# Altium PCB JLinkV9-nano.PcbDoc
Units mil, origin at the board's own origin, x right, y up, seen from the top; angles counter-clockwise.
Board outline 1816 x 920 mil, 2 copper layers (Top Layer, Bottom Layer); 56 components, 43 nets, 214 pads, 61 vias.
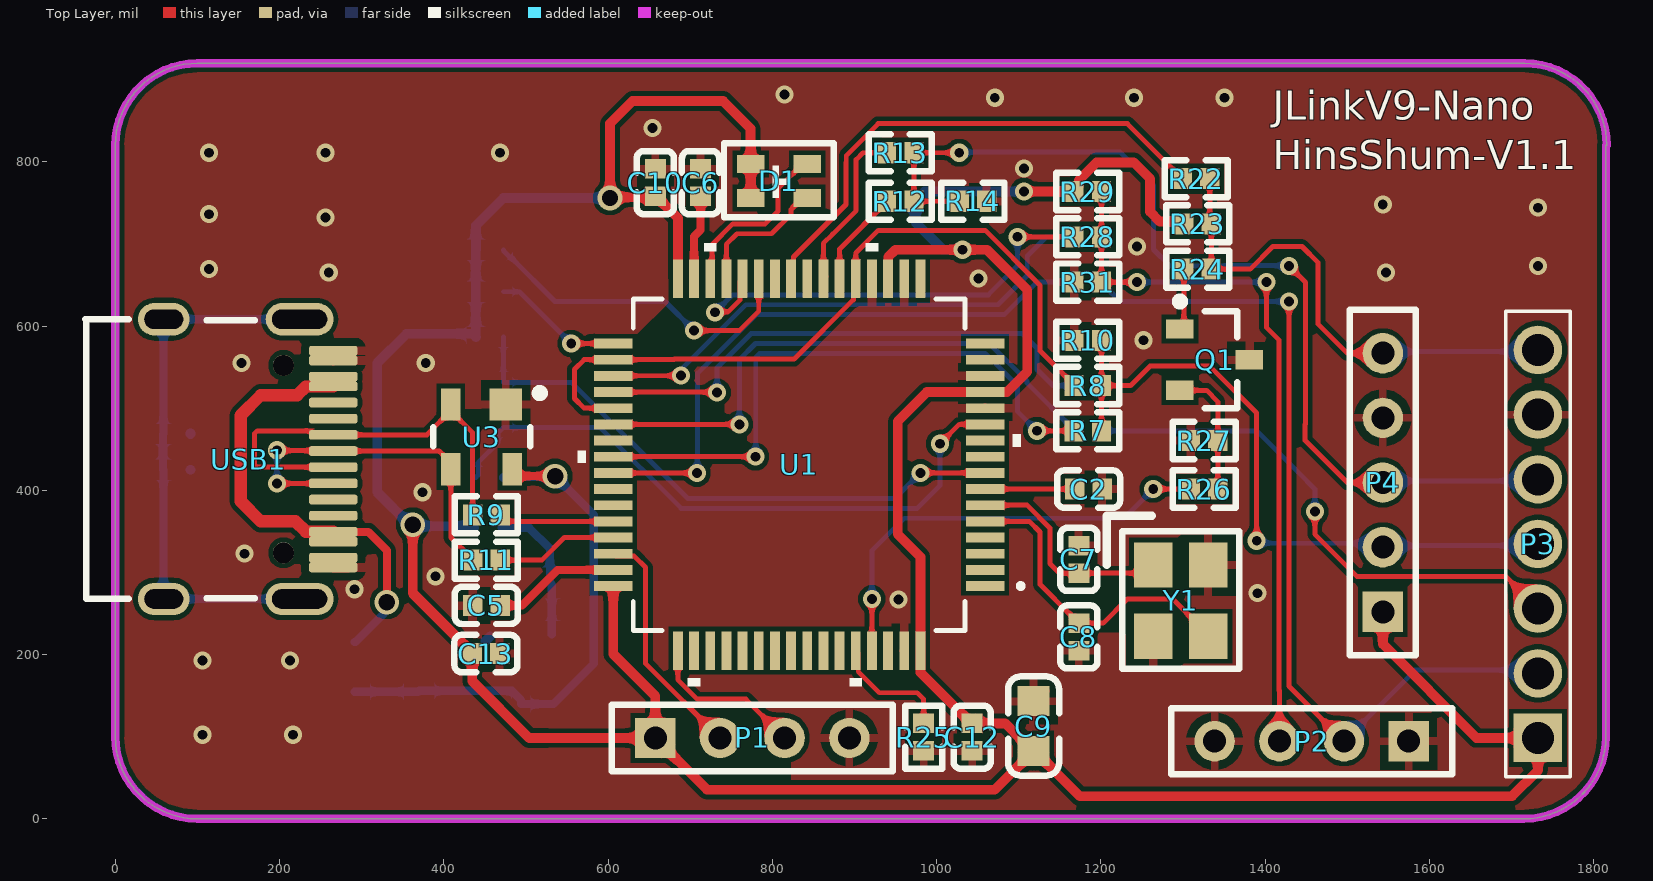
[diagram p0: Top Layer view]
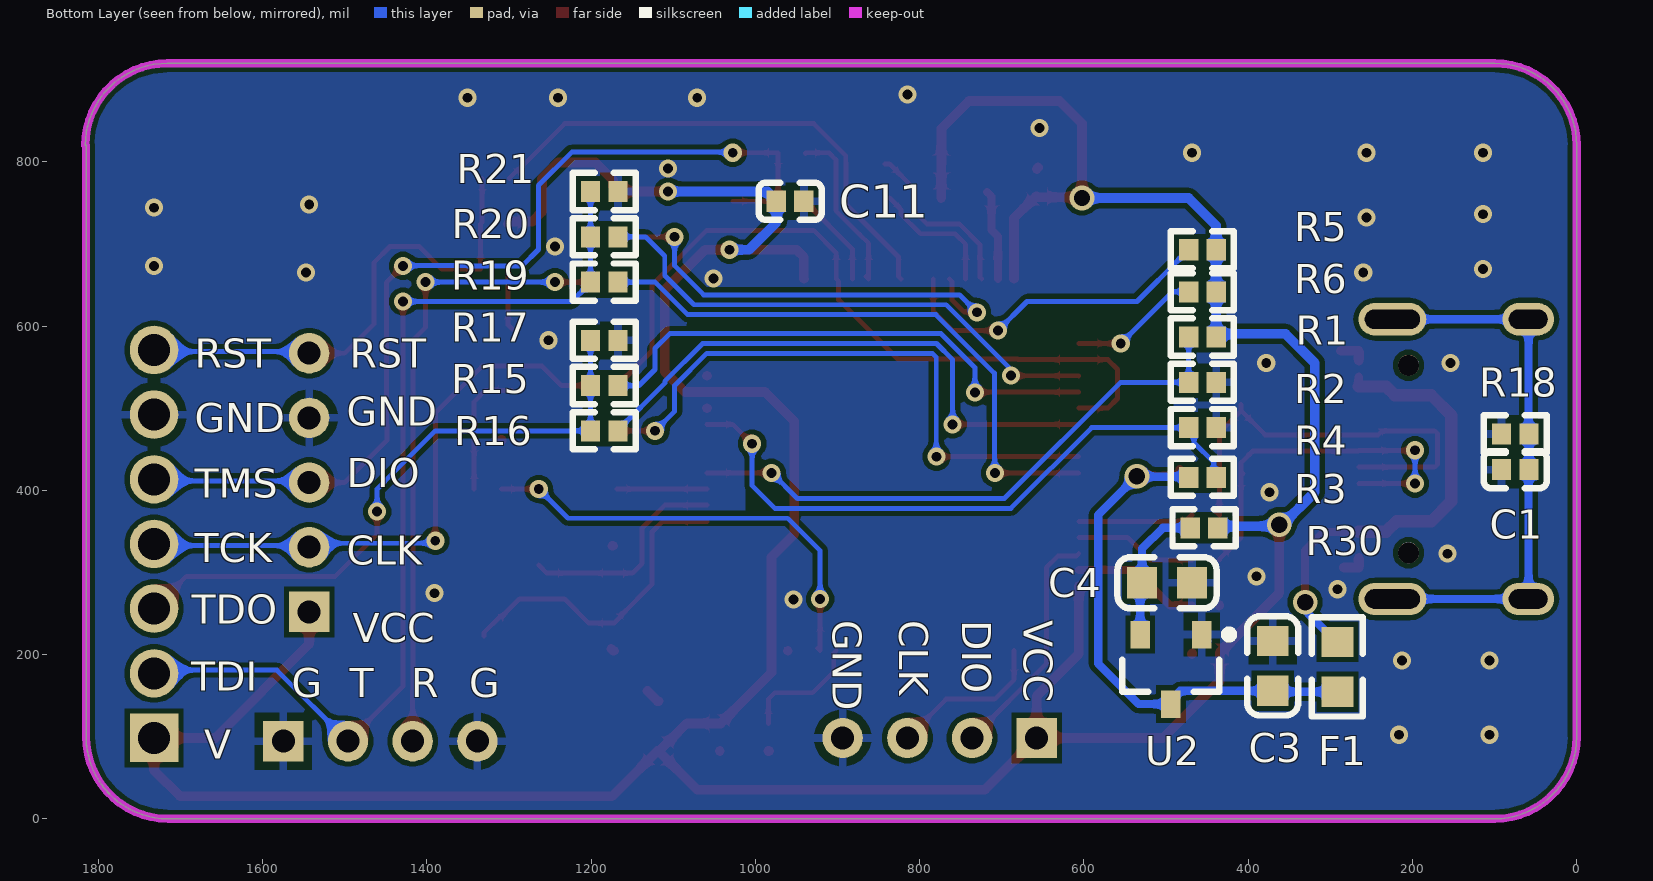
[diagram p1: Bottom Layer view, seen from below]
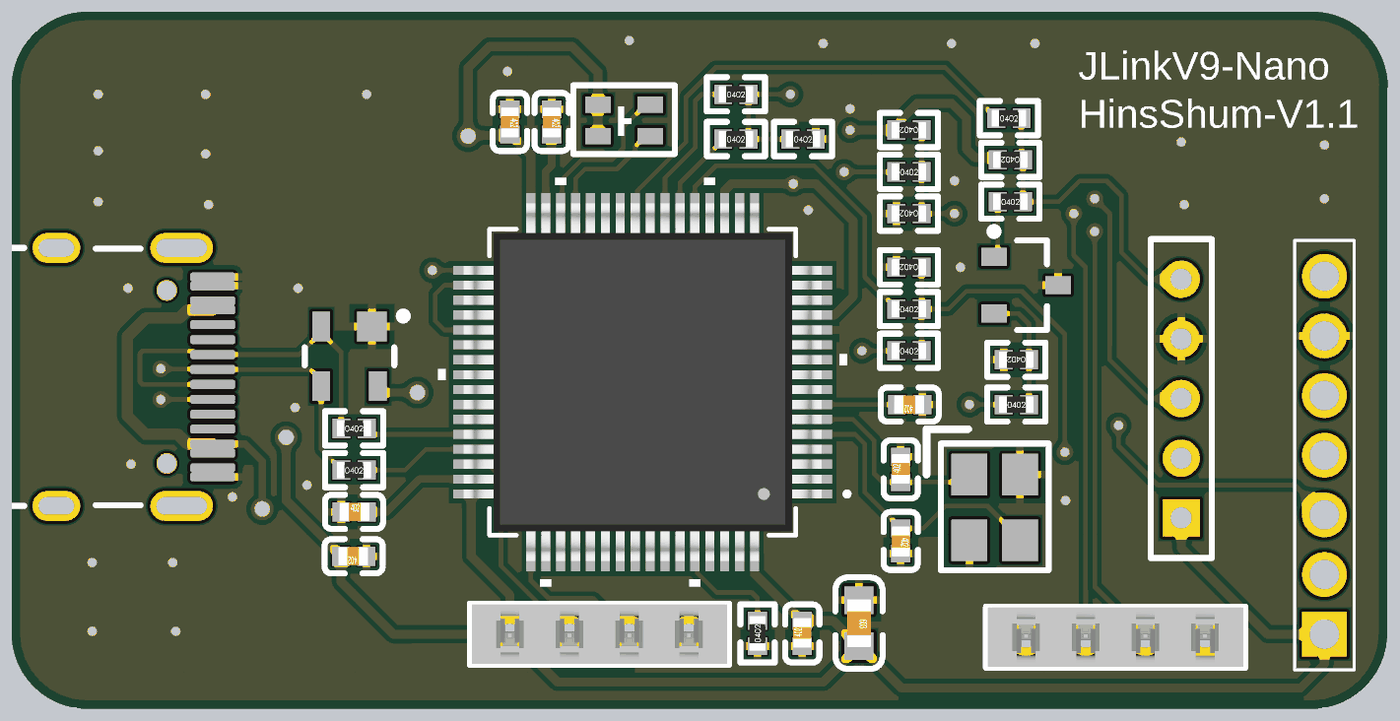
[diagram p2: 3D render of the assembled board from above, using the file's embedded part models]
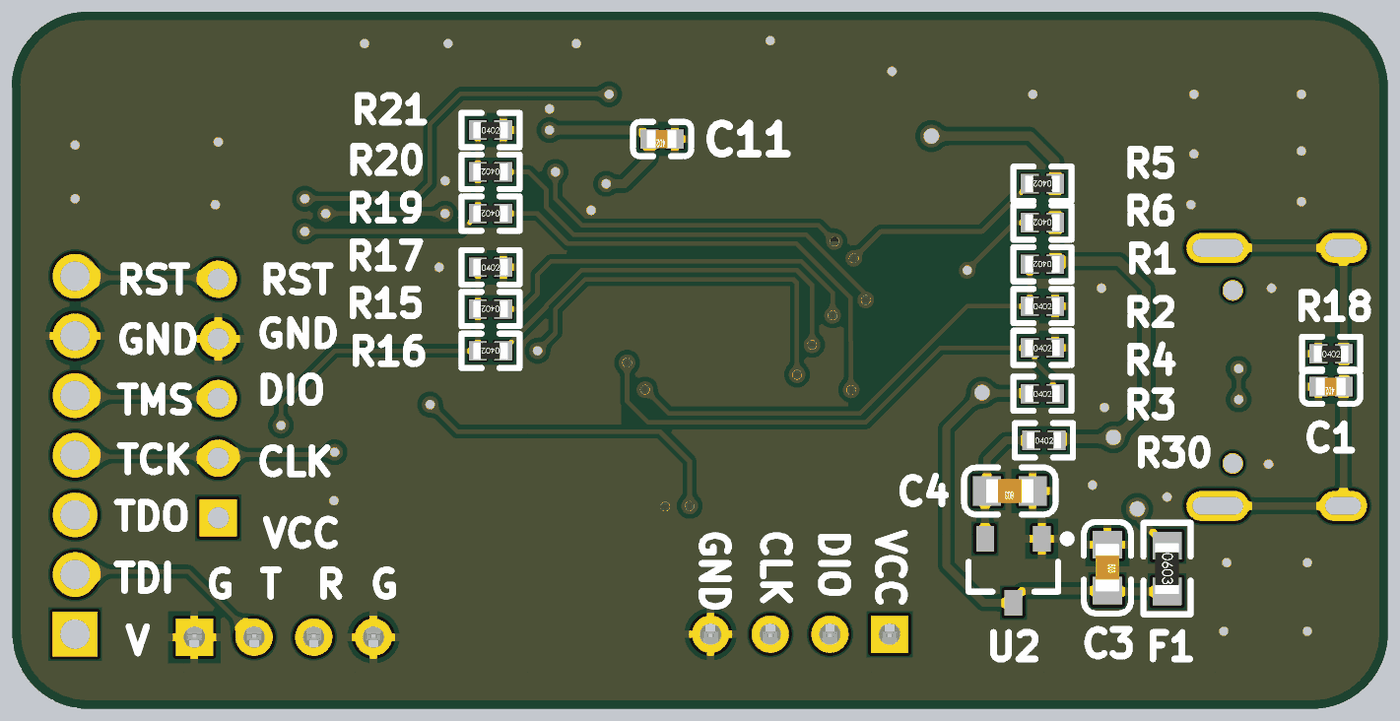
[diagram p3: 3D render of the assembled board from below, using the file's embedded part models]

## Layer stack, top to bottom
Top Solder: solder mask 0.4, Solder Resist, Dk 3.5
Top Layer: signal copper 1.4
Dielectric 1: dielectric 12.6, FR-4, Dk 4.8
Bottom Layer: signal copper 1.4
Bottom Solder: solder mask 0.4, Solder Resist, Dk 3.5

## Board outline
0,100 0,820 cw(c100,820) 100,920 1716,920 cw(c1716,820) 1816,820 1815,820 1815,100 cw(c1715,100) 1715,0 100,0 cw(c100,100)

## Design rules (kind name [scope] priority, off if disabled: settings)
Clearance [All] p1: gap=6 ignorepadtopadclearanceinfootprint=FALSE
PolygonConnect [All] p1: thpad.connectstyle=Relief thpad.reliefconductorwidth=10 thpad.reliefentries=4 thpad.polygonreliefangle="90 Angle" thpad.airgapwidth=10 smdpad.connectstyle=Relief smdpad.reliefconductorwidth=10 smdpad.reliefentries=4 smdpad.polygonreliefangle="90 Angle" smdpad.airgapwidth=10 via.connectstyle=Direct via.reliefconductorwidth=10 via.reliefentries=4 via.polygonreliefangle="90 Angle" via.airgapwidth=10
RoutingVias [All] p1: holewidth=12 width=22 viastyle="Through Hole" minholewidth=12 minwidth=22 maxholewidth=28 maxwidth=50
SilkToSolderMaskClearance [IsPad] p1: minsilkscreentomaskgap=2 clearancetoexposedcopper=TRUE
SolderMaskExpansion [All] p1: expansion=4 istentingtop=FALSE
Width Power [InNetClass('Power')] p1: maxlimit=20 minlimit=10 preferedwidth=10
Width [All] p2: maxlimit=10 minlimit=6 preferedwidth=6
29 further rules are at their usual default settings.

## Classes and differential pairs
net class Power: 3.3V 5V +5V_IN GND
component class JLinkV9-nano: C2 C3 C4 C5 C6 C7 C10 C11 C13 D1 F1 R1 R2 R3 R4 R5 R6 R7 R8 R9 R10 R12 R14 R15 R16 R17 R18 R19 R20 R21 R22 R23 R24 R25 R26 R27 R28 R29 R30 R31 U2 Y1

## Components (designator, comment, footprint, x,y, rotation, side; value= is the part's Value field where it differs from the comment)
C1 "Cap" C0402 74.8,425.2 r0 bottom value=10nF
C2 "Cap" C0402 1185.04,401.58 r180 top value=100nF
C3 "Cap" C0603 370.08,186.22 r270 bottom value=10uF
C4 "Cap" C0603 498.82,287.4 r0 bottom value=10uF
C5 "Cap" C0402 451.77,259.84 r0 top value=2.2uF
C6 "Cap" C0402 712.6,774.61 r270 top value=2.2uF
C7 "Cap" C0402 1173.23,315.94 r90 top value=22pF
C8 "Cap" C0402 1173.23,221.46 r270 top value=22pF
C9 "Cap" C0603 1118.11,112.99 r270 top value=10uF
C10 "Cap" C0402 657.48,774.61 r270 top value=100nF
C11 "Cap" C0402 957.68,751.97 r0 bottom value=100nF
C12 "Cap" C0402 1043.31,99.41 r90 top value=100nF
C13 "Cap" C0402 451.28,201.28 r180 top value=100nF
D1 "LED2" LED_2 859.25,755.91 r180 top
F1 "Fuse 2" R0603 291.34,185.04 r270 bottom
P1 "Header 4" 2_0MM_4_HEADER 657.48,98.43 r0 top
P2 "Header 4" 2_0MM_4_HEADER 1574.8,94.49 r180 top
P3 "Header 7" 2_0MM_7_HEADER 1732.28,98.43 r90 top
P4 "Header 5" 2_0MM_5_HEADER 1543.31,251.97 r90 top
Q1 "NEC3400" SOT-23_L 1338.58,559.06 r0 top
R1 "Res" R0402 455.71,586.61 r0 bottom value=10K
R2 "Res" R0402 455.71,531.5 r180 bottom value=10K
R3 "Res" R0402 455.71,415.85 r180 bottom value=10K
R4 "Res" R0402 455.71,476.38 r180 bottom value=10K
R5 "Res" R0402 455.71,692.91 r0 bottom value=10K
R6 "Res" R0402 455.71,641.73 r0 bottom value=10K
R7 "Res" R0402 1184.05,472.44 r0 top value=100R
R8 "Res" R0402 1184.05,527.56 r0 top value=100R
R9 "Res" R0402 451.77,370.08 r0 top value=22R
R10 "Res" R0402 1184.06,582.68 r180 top value=10K
R11 "Res" R0402 451.77,314.96 r0 top value=22R
R12 "Res" R0402 955.71,751.97 r0 top value=100R
R13 "Res" R0402 955.71,811.02 r0 top value=100R
R14 "Res" R0402 1044.29,751.97 r0 top value=10K
R15 "Res" R0402 1184.05,527.56 r0 bottom value=100R
R16 "Res" R0402 1184.05,472.44 r0 bottom value=100R
R17 "Res" R0402 1184.06,582.68 r180 bottom value=10K
R18 "Res" R0402 74.8,468.5 r180 bottom value=1M
R19 "Res" R0402 1184.05,653.54 r0 bottom value=100R
R20 "Res" R0402 1184.05,708.66 r0 bottom value=100R
R21 "Res" R0402 1184.06,763.78 r180 bottom value=10K
R22 "Res" R0402 1315.94,779.53 r0 top value=100R
R23 "Res" R0402 1317.91,724.41 r180 top value=10K
R24 "Res" R0402 1317.91,669.29 r0 top value=100R
R25 "Res" R0402 984.25,99.41 r90 top value=10K
R26 "Res" R0402 1325.79,401.57 r0 top value=1K
R27 "Res" R0402 1325.79,460.63 r180 top value=1M
R28 "Res" R0402 1184.05,708.66 r0 top value=100R
R29 "Res" R0402 1184.06,763.78 r180 top value=10K
R30 "Res" R0402 453.74,354.33 r180 bottom value=0R
R31 "Res" R0402 1184.06,653.54 r180 top value=10K
U1 "STM32F205RET6" LQFP64-10x10mm 832.68,431.1 r180 top
U2 "ME6210A33M3G" SOT-23_L 494.09,182.09 r270 bottom
U3 "UET14A05L03" SOT-143_L 445.91,465.2 r270 top
USB1 "Type-C" USB-Type-C 166.14,437.99 r180 top
Y1 "12M" XTAL4 1297.24,309.06 r270 top

## Footprints (in the part's own frame and the unit in brackets; to place one, negate y for a bottom-side part, rotate by r counter-clockwise, add the part's x,y. Pads: shape width x height; smd on the part's side, far side on the other; paste and mask are expansions set on the pad)
2_0MM_4_HEADER [mm] "Through Hole Box Connector Strip Assembly, 1x4 Pins, Vertical, 2mm Pitch, Female"
  rect 1.25x1.25 hole 0.711: 1(0,0)
  round 1.25 hole 0.711: 2(2,0) 3(4,0) 4(6,0)
  silkscreen extent -1.35,-1.03 7.34,1.03, body extent -1.28,-1 7.28,1, height 4.44
2_0MM_5_HEADER [mm] "Through Hole Box Connector Strip Assembly, 1x4 Pins, Vertical, 2mm Pitch, Female"
  rect 1.25x1.25 hole 0.711: 1(0,0)
  round 1.25 hole 0.711: 2(2,0) 3(4,0) 4(6,0) 5(8,0)
  silkscreen extent -1.35,-1.03 9.35,1.03
2_0MM_7_HEADER [mm] "Socket Strip Assembly, 1x7 Pins, Right Anlge, 2mm Pitch, Female"
  rect 1.5x1.5 hole 0.99: 1(0,0)
  round 1.5 hole 0.99: 2(2,0) 3(4,0) 4(6,0) 5(8,0) 6(10,0) 7(12,0)
  silkscreen extent -1.2,-1 13.2,1
C0402 [mm] "电容"
  rect 0.6x0.65 smd mask+0.051: 1(-0.425,0) 2(0.425,0)
  silkscreen extent -0.97,-0.58 0.97,0.58, body extent -0.48,-0.3 0.52,0.3, height 0.2
C0603 [mm]
  rect 0.93x0.98 smd: 1(-0.77,0) 2(0.77,0)
  silkscreen extent -1.53,-0.79 1.54,0.79, body extent -0.8,-0.4 0.8,0.4, height 0.3
LED_2 [mm]
  rect 0.85x0.55 smd: 1(2.175,0) 2(0.425,0) 3(2.175,-1.05) 4(0.425,-1.05)
  silkscreen extent -0.4,-1.7 3,0.6
LQFP64-10x10mm [mil]
  rect 47x12 smd paste+0 mask+0: 1(-226.38,147.64) 2(-226.38,127.95) 3(-226.38,108.27) 4(-226.38,88.58) 5(-226.38,68.9) 6(-226.38,49.21) 7(-226.38,29.53) 8(-226.38,9.84) 9(-226.38,-9.84) 10(-226.38,-29.53) 11(-226.38,-49.21) 12(-226.38,-68.9) 13(-226.38,-88.58) 14(-226.38,-108.27) 15(-226.38,-127.95) 16(-226.38,-147.64) 33(226.38,-147.64) 34(226.38,-127.95) 35(226.38,-108.27) 36(226.38,-88.58) 37(226.38,-68.9) 38(226.38,-49.21) 39(226.38,-29.53) 40(226.38,-9.84) 41(226.38,9.84) 42(226.38,29.53) 43(226.38,49.21) 44(226.38,68.9) 45(226.38,88.58) 46(226.38,108.27) 47(226.38,127.95) 48(226.38,147.64)
  rect 12x47 smd paste+0 mask+0: 17(-147.64,-226.38) 18(-127.95,-226.38) 19(-108.27,-226.38) 20(-88.58,-226.38) 21(-68.9,-226.38) 22(-49.21,-226.38) 23(-29.53,-226.38) 24(-9.84,-226.38) 25(9.84,-226.38) 26(29.53,-226.38) 27(49.21,-226.38) 28(68.9,-226.38) 29(88.58,-226.38) 30(108.27,-226.38) 31(127.95,-226.38) 32(147.64,-226.38) 49(147.64,226.38) 50(127.95,226.38) 51(108.27,226.38) 52(88.58,226.38) 53(68.9,226.38) 54(49.21,226.38) 55(29.53,226.38) 56(9.84,226.38) 57(-9.84,226.38) 58(-29.53,226.38) 59(-49.21,226.38) 60(-68.9,226.38) 61(-88.58,226.38) 62(-108.27,226.38) 63(-127.95,226.38) 64(-147.64,226.38)
  silkscreen extent -273,-270 270,270, body extent -236,-236 236,236, height 63
R0402 [mm] "电阻"
  rect 0.6x0.65 smd mask+0.051: 1(-0.425,0) 2(0.425,0)
  silkscreen extent -0.97,-0.58 0.97,0.58, body extent -0.57,-0.27 0.57,0.28, height 0.41
R0603 [mm]
  rect 0.93x0.98 smd: 1(-0.77,0) 2(0.77,0)
  silkscreen extent -1.53,-0.79 1.54,0.79, body extent -0.85,-0.4 0.85,0.4, height 0.56
SOT-23_L [mm] "SOT23, 3-Leads, Body 2.9x1.3mm, Pitch 0.95mm, Lead Span 2.5mm, IPC High Density"
  rect 0.85x0.6 smd: 1(-1.075,0.95) 2(-1.075,-0.95) 3(1.075,0)
  silkscreen extent -1.2,-1.5 0.7,1.92, body extent -0.7,-1.5 0.7,1.5, height 1.1
SOT-143_L [mm] "SOT143, 4-Leads, Body 2.9x1.3mm, Pitch 1.9mm, Lead Span 2.5mm, IPC High Density"
  rect 1x1 smd: 1(-1,0.75)
  rect 1x0.6 smd: 2(-1,-0.95) 3(1,-0.95) 4(1,0.95)
  silkscreen extent -1.47,-1.5 0.3,1.93, body extent -0.7,-1.52 0.7,1.52, height 1.1
USB-Type-C [mm]
  round 0.65 hole 0.65: 0(-0.98,2.9) 0(-0.98,-2.9)
  oval 1.6x1 hole 0.6 slot 1.2 at 0 deg: 1(2.72,4.325) 2(2.72,-4.325)
  oval 2.1x1 hole 0.6 slot 1.7 at 0 deg: 3(-1.48,-4.325) 4(-1.48,4.325)
  rrect50% 1.5x0.3 smd: A1(-2.52,-3.35) A4(-2.52,-2.55) A5(-2.52,-1.25) A6(-2.52,-0.25) A7(-2.52,0.25) A8(-2.52,1.25) A9(-2.52,2.55) A12(-2.52,3.35) B1(-2.52,3.05) B4(-2.52,2.25) B5(-2.52,1.75) B6(-2.52,0.75) B7(-2.52,-0.75) B8(-2.52,-1.75) B9(-2.52,-2.25) B12(-2.52,-3.05)
  silkscreen extent -0.1,-4.33 5.15,4.33, body extent -2.64,-4.48 5.26,4.46, height 0.25
XTAL4 [mm]
  rect 1.4x1.2 smd: 1(0,-0.85) 2(2.2,-0.85) 3(2.2,0.85) 4(0,0.85)
  silkscreen extent -1.52,-2.29 3.2,1.81

## Part data
C1 C2 C3 C4 C5 C6 C7 C8 C9 C10 C11 C12 C13: "Capacitor", LatestRevisionDate=17-Jul-2002, LatestRevisionNote="Re-released for DXP Platform.", PackageDescription="Radial Cap, Thru-Hole; 2 Leads; 0.3 in Pin Spacing", PackageReference=RAD-0.3, Published=8-Jun-2000, Publisher="Altium Limited"
D1: "Typical RED, GREEN, YELLOW, AMBER GaAs LED", LatestRevisionDate=17-Jul-2002, LatestRevisionNote="Re-released for DXP Platform.", PackageDescription="SM LED; 2 Flat Leads", PackageReference=3.2X1.6X1.1, PackageVersion=Feb-2002, Published=8-Jun-2000, Publisher="Altium Limited"
F1: "Fuse", LatestRevisionDate=17-Jul-2002, LatestRevisionNote="Re-released for DXP Platform.", PackageDescription="Thru-Hole; 2 Leads", PackageReference=PIN-W2/E2.8, Published=8-Jun-2000, Publisher="Altium Limited"
P1 P2: "Header, 4-Pin", LatestRevisionDate=17-Jul-2002, LatestRevisionNote="Re-released for DXP Platform.", Publisher="Altium Limited"
P3: "Header, 7-Pin", LatestRevisionDate=17-Jul-2002, LatestRevisionNote="Re-released for DXP Platform.", Publisher="Altium Limited"
P4: "Header, 5-Pin", LatestRevisionDate=17-Jul-2002, LatestRevisionNote="Re-released for DXP Platform.", Publisher="Altium Limited"
Q1: library part MOSFET-N, "N-Channel MOSFET", LatestRevisionDate=17-Jul-2002, LatestRevisionNote="Re-released for DXP Platform.", PackageDescription="TO, Flat Index; 3 In-Line, Axial Leads; Body Dia. 4.6mm; Lead Dia. 0.5 mm (max)", PackageReference=E3, PackageVersion=1995/1996, Published=8-Jun-2000, Publisher="Altium Limited"
R1 R2 R3 R4 R5 R6 R7 R8 R9 R10 R11 R12 R13 R14 R15 R16 R17 R18 R19 R20 R21 R22 R23 R24 R25 R26 R27 R28 R29 R30 R31: "Resistor", LatestRevisionDate=17-Jul-2002, LatestRevisionNote="Re-released for DXP Platform.", PackageDescription="Axial Device, Thru-Hole; 2 Leads; 0.3 in Pin Spacing", PackageReference=AXIAL-0.3, Published=8-Jun-2000, Publisher="Altium Limited"
U1: "No Description Available", Mfr_Name=STMicroelectronics, Copyright="Copyright (C) 2021 Ultra Librarian. All rights reserved.", Manufacturer_Part_Number=STM32F205RET6, RefDes=RefDes, Type=DEV
U3: library part ESD4
USB1: library part USB-TYPE-C
Y1: library part XTAL4

## Via types
v1: diameter 22, hole 12, Top Layer to Bottom Layer, tented both sides, 57 vias
v2: diameter 30, hole 20, Top Layer to Bottom Layer, tented both sides, 4 vias

## Nets (pads, with @x,y where several pads share a name; then routed paths per layer and width w, separated by ;. In a path a pad name is that pad's centre, name@x,y a point inside that pad or via, vN(x,y) a via of type N, cw(c..) or ccw(c..) an arc to the next point about the centre after c; other vN are vias at no path point)
3.3V: C9.2 C10.2 C11.2 C12.2 C13.2 D1.1 D1.3 P1.1 P3.1 P4.1 R1.1 R5.1 R6.1 R23.2 R29.2 R30.2 U1.13 U1.19 U1.32 U1.48 U1.64 | length 4932.8
  Top Layer w11.81: 527.56,98.43 P1.1 720.47,35.43 1070.87,35.43 C9.2 ; C10.2 658.46,757.87 685.04,731.3 U1.32 ; D1.1 D1.3 ; U1.19 941.04,657.57 941.04,684.23 949.73,692.91 v1(1031.5,692.91) 1061.6,692.91 1110.24,644.28 1110.24,544.21 1085.8,519.78 1059.15,519.78 U1.13 988.19,519.69 952.76,484.25 952.76,346.46 980.31,318.9 U1.64 980.41,204.63 980.41,178.06 1042.32,116.14 C12.2 1083.66,116.14 1117.13,82.68 C9.2 ; v1(1106.3,763.78) R29.2 1173.23,769.69 1173.23,777.66 1194.78,799.21 1240.16,799.21 1259.84,779.53 1259.84,739.2 1271.65,727.39 1298.2,727.39 R23.2 ; P4.1 1543.31,212.6 1657.48,98.43 P3.1 1732.28,59.06 1700.79,27.56 1174.21,27.56 1119.09,82.68 C9.2
  Top Layer w12: v2(362.2,358.27) 362.2,274.61 434.55,202.26 C13.2 434.55,167.81 503.94,98.43 527.56,98.43 ; U1.48 606.3,200.79 657.48,149.61 P1.1 ; C10.2 656.5,756.89 603.35,756.89 v2(602.36,755.91) 602.36,846.46 629.92,874.02 740.16,874.02 773.62,840.55 D1.3
  Bottom Layer w11.81: R1.1 R6.1 R5.1 ; v1(1031.5,692.91) 1007.87,692.91 973.92,726.87 973.92,752.46 980.32,758.86 985.24,763.78 v1(1106.3,763.78)
  Bottom Layer w12: R30.2 435.04,356.3 364.17,356.3 v2(362.2,358.27) 358.27,358.27 318.9,397.64 318.9,555.12 354.33,590.55 435.04,590.55 R1.1 ; R5.1 438.98,722.44 472.44,755.91 v2(602.36,755.91)
5V: C3.2 F1.2 R3.1 U2.3 U3.4 | length 691.3
  Top Layer w10: U3.4 483.31,424.13 490.12,417.32 v2(535.43,417.32)
  Bottom Layer w10: F1.2 368.9,154.72 C3.2 482.87,155.91 494.09,144.68 U2.3 533.46,139.76 582.68,188.98 582.68,370.08 v2(535.43,417.32) 534.69,416.58 474.16,416.58 472.44,414.86 R3.1
+5V_IN: F1.1 USB1.A4 USB1.A9 USB1.B4 USB1.B9 | length 574.9
  Top Layer w10: USB1.B4 308.07,349.41 330.71,326.77 v2(330.71,263.78) ; USB1.B9 USB1.A4
  Top Layer w15: USB1.B4 265.07,349.69 231.96,349.69 219.45,362.2 177.17,362.2 152.55,386.82 152.55,491.13 177.17,515.75 221.42,515.75 231.96,526.3 265.07,526.3 USB1.B9
  Bottom Layer w10: F1.1 292.32,215.35 326.88,249.91 326.88,259.95 v2(330.71,263.78)
GLED: D1.4 U1.30 | length 215.2
  Top Layer w6: U1.30 726.6,659.67 726.6,699.04 751.97,724.41 791.34,724.41 807.09,740.16 807.09,767.72 836.61,797.24 D1.4
GND: C1.2 C2.1 C3.1 C4.1 C5.1 C6.1 C7.2 C8.2 C9.1 C10.1 C11.1 C12.1 C13.1 P1.4 P2.1 P2.4 P3.6 P4.4 Q1.3 R2.2 R4.2 R10.2 R14.2 R17.2 R18.1 R21.2 R25.1 R27.2 R31.2 U1.12 U1.14 U1.18 U1.20 U1.63 U2.1 U3.1 USB1.A1 USB1.A12 USB1.B1 USB1.B12 Y1.2 Y1.4 | length 171
  Top Layer w11.81: USB1.B1 USB1.A12 USB1.A12@283.46,306.1 ; USB1.B12 USB1.A1 USB1.A1@287.4,569.88 ; v1@374.02,394.88 v1(374.02,397.64) ; v1@375.2,555.12 v1(377.95,555.12) v1@380.71,555.12 ; v1(389.76,295.28) v1@391.71,293.33 ; C5.1 C5.1@435.04,260.83 ; C13.1 C13.1@468.5,200.79 ; v1(654.22,841.34) v1@655.85,839.71 ; C10.1@655.85,792.97 C10.1 ; P1.4 P1.4@899.7,92.43 ; v1@953.63,264.08 v1(953.63,266.84) ; U1.63 U1.63@960.72,204.63 ; R25.1@983.27,82.68 R25.1 ; U1.14@1058.96,539.46 U1.14 ; U1.12 U1.12@1059.15,499.91 ; C9.1 1119.09,143.31 C9.1@1131.5,155.71 ; C8.2@1172.24,204.72 C8.2 C8.2@1175.69,207.19 ; C7.2 C7.2@1174.21,332.68 ; v1(1251.97,582.68) v1@1251.97,585.43 ; R27.2 R27.2@1309.06,461.61 ; P2.4@1338.58,86.61 P2.4 ; v1@1388.69,276.66 v1(1390.64,274.71) ; P2.1@1566.93,86.61 P2.1
  Bottom Layer w11.81: R18.1 R18.1@91.54,469.49 ; v1@377.95,552.36 v1(377.95,555.12) ; U2.1@450.79,216.54 U2.1@456.69,222.44 ; P1.4 P1.4@895.67,96.46 ; C11.1 C11.1@940.94,752.95 ; v1@1048.47,657.98 v1(1051.23,657.98) ; v1(1106.3,791.78) v1@1106.74,791.34 ; v1(1251.97,582.68) v1@1252.08,582.57 ; P2.4@1336.61,96.46 P2.4 ; P3.6@1728.35,488.19 P3.6
  other v1: 106.3,102.36 216.54,102.36 106.3,192.91 212.6,192.91 291.34,279.53 157.48,322.83 153.54,555.12 259.84,665.35 1547.24,665.35 114.17,669.29 1732.28,673.23 1244.09,696.85 255.91,732.28 114.17,736.22 1732.28,744.09 1543.31,748.03 114.17,811.02 255.91,811.02 468.5,811.02 1070.87,877.95 1240.16,877.95 1350.39,877.95 814.96,881.89
NetC1_1: C1.1 R18.2 USB1.1 USB1.2 USB1.3 USB1.4 | length 672.1
  Bottom Layer w9.84: USB1.4 USB1.1 58.56,268.21 58.56,424.7 C1.1 R18.2 58.56,469 58.56,607.78 USB1.2 USB1.3
NetC2_2: C2.2 U1.7 | length 109.3
  Top Layer w6: U1.7 C2.2
NetC4_2: C4.2 R30.1 U2.2 | length 174.8
  Bottom Layer w10: R30.1 503.94,354.33 529.13,329.13 C4.2 531.5,285.04 U2.2
NetC5_2: C5.2 U1.47 | length 155.7
  Top Layer w9.84: C5.2 495.08,259.84 538.39,303.15 U1.47
NetC6_2: C6.2 U1.31 | length 110.8
  Top Layer w10: U1.31 704.72,709.08 712.6,716.96 C6.2 C6.2@717.66,762.93
NetQ1_1: Q1.1 R24.1 | length 74.9
  Top Layer w6: Q1.1 1301.18,601.38 R24.1
NetQ1_2: Q1.2 R26.2 R27.1 | length 158.3
  Top Layer w6: Q1.2 1328.74,521.65 1342.52,507.87 R27.1 R26.2
NetR9_2: R9.2 U1.44 | length 141.1
  Top Layer w6: R9.2 476.38,362.2 U1.44
NetR11_2: R11.2 U1.45 | length 149.2
  Top Layer w6: R11.2 519.28,314.96 546.84,342.52 U1.45
NetR25_2: R25.2 U1.60 | length 149.9
  Top Layer w6: U1.60 904.57,201.72 904.57,179.18 930.21,153.54 976.38,153.54 984.25,145.67 R25.2
OSC_IN: C8.1 U1.5 Y1.3 | length 394.2
  Top Layer w6: U1.5 1112.95,362.2 1125.98,349.17 1125.98,285.43 1163.43,247.98 1163.43,247 1172.24,238.19 C8.1 1202.76,238.19 1232.28,267.72 1287.4,267.72 1308.12,247 1310.09,247 1330.71,226.38 Y1.3
OSC_OUT: C7.1 U1.6 Y1.1 | length 268.4
  Top Layer w6: U1.6 1110.24,381.89 1137.98,354.14 1137.98,310.84 1149.61,299.21 C7.1 1253.94,299.21 Y1.1
PA5_PB13_PC6: R8.1 U1.21 U1.34 U1.37 | length 923.2
  Top Layer w6: U1.37 570.87,500 559.06,511.81 559.06,547.24 570.87,559.06 U1.34 680.06,559.06 680.69,559.69 826.32,559.69 898.57,631.94 898.57,654.48 U1.21 901.57,688.98 929.13,716.54 1059.06,716.54 1125.98,649.61 1125.98,569.88 1167.32,528.54 R8.1
PA6: R12.1 U1.22 | length 117.2
  Top Layer w6: U1.22 881.89,693.9 R12.1@938.98,750.98
PA7: R13.1 U1.23 | length 207.3
  Top Layer w6: U1.23@865.2,660.48 U1.23 862.2,700.79 873.4,711.99 902.01,740.59 902.01,802.61 910.43,811.02 R13.1 R13.1@938.98,810.04
PA8: R19.1 U1.41 | length 728.5
  Top Layer w6: U1.41 606.48,421.08 708.12,421.08 v1(708.3,420.9)
  Bottom Layer w6: v1(708.3,420.9) 708.66,421.26 708.66,485.53 708.98,485.84 708.98,542.71 780.25,613.98 1082.49,613.98 1122.05,653.54 R19.1
PB1: R5.2 U1.27 | length 401.5
  Top Layer w6: v1(704.72,594.49) 759.84,594.49 783.46,618.11 U1.27
  Bottom Layer w6: R5.2 472.44,691.93 481.25,683.12 482.24,683.12 535.43,629.92 669.29,629.92 v1(704.72,594.49)
PB2: R28.1 U1.28 | length 559.5
  Top Layer w6: v1(730.19,616.74) 730.84,617.39 746.23,617.39 760.78,631.94 760.78,654.48 U1.28 ; v1(1098.43,708.66) R28.1
  Bottom Layer w6: v1(730.19,616.74) 751.43,637.98 1062.99,637.98 1098.43,673.42 v1(1098.43,708.66)
PB8: R26.1 U1.61 | length 545
  Top Layer w6: v1(921.26,267.72) U1.61 U1.61@924.26,207.72 ; v1(1263.78,401.57) R26.1
  Bottom Layer w6: v1(921.26,267.72) 921.26,326.58 960.63,365.95 1228.16,365.95 v1(1263.78,401.57)
PB12: R6.2 U1.33 | length 160
  Top Layer w6: v1(555.12,578.74) U1.33
  Bottom Layer w6: R6.2 492.13,641.73 v1(555.12,578.74)
PB14: R20.1 U1.35 | length 649.4
  Top Layer w6: U1.35 606.46,539.53 688.82,539.53 v1(688.98,539.69)
  Bottom Layer w6: v1(688.98,539.69) 692.04,542.75 692.04,550.31 767.72,625.98 1074.8,625.98 1110.43,661.61 1110.43,685.23 1133.86,708.66 R20.1
PB15: R15.1 U1.36 | length 649.7
  Top Layer w6: U1.36 606.5,519.49 732.48,519.49 v1(732.68,519.29)
  Bottom Layer w6: v1(732.68,519.29) 732.68,549.45 774.01,590.78 1104.28,590.78 1122.24,572.83 1122.24,566.74 1122.24,547.06 1141.73,527.56 R15.1
PC0: R1.2 R2.1 U1.8 | length 713.3
  Top Layer w6: v1(980.31,421.26) U1.8
  Bottom Layer w6: R1.2 R2.1 555.31,531.5 696.85,389.95 949.01,389.95 v1(980.31,421.26)
PC3: R3.2 R4.1 U1.11 | length 774.2
  Top Layer w6: v1(1003.94,456.69) 1027.58,480.34 U1.11
  Bottom Layer w6: R3.2 442,418.87 442,434.13 465.97,458.1 465.97,469.91 R4.1 590.55,476.38 688.98,377.95 976.38,377.95 1003.94,405.51 v1(1003.94,456.69)
PC5: R22.1 U1.25 | length 631.5
  Top Layer w6: U1.25 825.83,660.48 825.83,684.1 889.76,748.03 889.76,799.21 890.01,799.46 890.01,807.58 928.89,846.46 1232.28,846.46 1289.42,789.32 1290.4,789.32 1299.21,780.51 R22.1
PC7: R16.1 U1.38 | length 693.9
  Top Layer w6: U1.38 v1(759.84,480.32)
  Bottom Layer w6: v1(759.84,480.32) 759.84,559.06 779.57,578.78 1064.17,578.78 1110.24,532.72 1110.24,530.51 1167.32,473.43 R16.1
PC9: R7.1 U1.40 | length 741.5
  Top Layer w6: U1.40 v1(779.53,440.95) ; v1(1122.05,472.44) R7.1
  Bottom Layer w6: v1(779.53,440.95) 779.84,441.26 779.84,562.08 784.54,566.78 1059.2,566.78 1098.43,527.56 1098.43,496.06 v1(1122.05,472.44)
RLED: D1.2 U1.29 | length 167.3
  Top Layer w6: U1.29 744.09,699.57 756.94,712.41 799.02,712.41 822.83,736.22 822.83,742.13 836.61,755.91 D1.2
RST: P3.7 P4.5 R22.2 R23.1 R24.2 | length 619.4
  Top Layer w6: R22.2 1332.68,726.38 R23.1 R24.2 1381.89,669.29 1409.45,696.85 1444.88,696.85 1464.57,677.17 1464.57,602.36 1500,566.93 P4.5
  Bottom Layer w6: P4.5 1545.28,568.9 1730.32,568.9 P3.7
RX: P2.3 R28.2 R29.1 R31.1 | length 876.6
  Top Layer w6: R29.1 R28.2 R31.1 v1(1244.09,653.54) ; v1(1401.57,653.54) 1401.57,598.43 1417.13,582.87 1417.13,156.45 1417.32,156.26 P2.3
  Bottom Layer w6: v1(1244.09,653.54) 1354.33,653.54 v1(1401.57,653.54)
SWDCLK: P1.3 U1.49 | length 194.7
  Top Layer w6: U1.49 685.04,169.29 708.66,145.67 767.72,145.67 P1.3
SWDIO: P1.2 U1.46 | length 291.4
  Top Layer w6: U1.46 609.3,319.83 631.84,319.83 645.67,306.01 645.67,188.98 P1.2
TCK_SWDCLK: P3.4 P4.2 R7.2 R8.2 R10.1 | length 835.6
  Top Layer w6: R7.2 R8.2 ; R10.1 R8.2 ; v1(1389.76,338.58) 1389.76,494.16 1332.74,551.18 1259.84,551.18 1236.22,527.56 R8.2
  Bottom Layer w6: v1(1389.76,338.58) 1392.83,335.52 1538.49,335.52 P4.2 1545.28,332.68 1730.32,332.68 P3.4
TDI_TX: P2.2 P3.2 R19.2 R20.2 R21.1 | length 1185.8
  Top Layer w6: v1(1429.13,629.92) 1429.13,161.42 P2.2
  Bottom Layer w6: R21.1 R20.2 R19.2 1200.79,652.56 1223.43,629.92 v1(1429.13,629.92) ; P2.2 1582.68,181.1 1728.35,181.1 P3.2
TDO: P3.3 R15.2 R16.2 R17.1 | length 763.7
  Top Layer w6: v1(1460.63,374.02) 1460.63,346.46 1511.81,295.28 1692.91,295.28 P3.3
  Bottom Layer w6: R17.1 R15.2 R16.2 1389.76,472.44 1440.94,421.26 1460.63,401.57 v1(1460.63,374.02)
TMS_SWDIO: P3.5 P4.3 R12.2 R13.2 R14.1 | length 1201.9
  Top Layer w6: R14.1 R12.2 R13.2 v1(1027.56,811.02) ; v1(1429.13,673.23) 1449.13,653.23 1449.13,480.63 1448.82,480.32 1448.82,460.63 1500,409.45 P4.3
  Bottom Layer w6: v1(1027.56,811.02) 1028.32,811.78 1223.65,811.78 1264.09,771.34 1264.09,693.23 1284.09,673.23 1350.44,673.23 1350.76,673.54 1428.82,673.54 v1(1429.13,673.23) ; P4.3 1545.28,411.42 1730.32,411.42 P3.5
USB_DM: R9.1 U3.2 USB1.A7 USB1.B7 | length 543.4
  Top Layer w6: USB1.A7 172.81,428.15 169.29,431.66 169.29,468.93 172.81,472.44 236.81,472.44 241.73,467.52 379.33,467.52 U3.2@408.5,496.69 ; U3.2 U3.2@408.5,496.69 ; R9.1@440.94,375.98 R9.1 435.04,470.16 U3.2@408.5,496.69
USB_DP: R11.1 U3.3 USB1.A6 USB1.B6 | length 460.2
  Top Layer w6: v1(196.85,408.15) 197.01,408.31 265.2,408.31 USB1.B6 ; v1(196.85,448.82) 197.34,448.33 264.86,448.33 USB1.A6 394.37,447.84 408.5,433.7 U3.3 U3.3@408.5,417.95 ; U3.3@406.18,420.28 U3.3@408.5,417.95 ; R11.1 435.04,315.95 408.5,342.48 U3.3@408.5,417.95
  Bottom Layer w6: v1(196.85,408.15) v1(196.85,448.82)
pads on no net: U1.1 U1.2 U1.3 U1.4 U1.9 U1.10 U1.15 U1.16 U1.17 U1.24 U1.26 U1.39 U1.42 U1.43 U1.50 U1.51 U1.52 U1.53 U1.54 U1.55 U1.56 U1.57 U1.58 U1.59 U1.62 USB1.0 USB1.A5 USB1.A8 USB1.B5 USB1.B8

## Polygon pours and split planes (outlines as drawn)
GND on Bottom Layer "GND_L02_P000" (solid, remove dead copper, pour order 0): -78.74,1007.87 1881.89,1007.87 1881.89,-43.31 1826.77,-98.43 -62.99,-98.43
GND on Top Layer "GND_L01_P001" (solid, remove dead copper, pour order 1): -74.8,1007.87 -74.8,-102.36 -70.87,-106.3 -51.18,-86.61 1877.95,-86.61 1877.95,996.06 1866.14,1007.87

## Keep-outs
Keep-Out Layer:
  lines w10: 1715,920 100,920 ccw(c100,820) 0,820 0,100 ccw(c100,100) 100,0 1715,0 ccw(c1715,100) 1815,100 1815,820 ; 1716,920 cw(c1716,820) 1816,820

## Other copper
Top Layer:
  pour cut-out: 792.64,627.22 793.4,627.98 875.11,627.98 875.11,625.27 877.02,623.36 822.52,568.86 636.11,568.86 635.8,568.55 635.8,590.74 673.04,627.98 711.03,627.98 711.03,616.95 713.19,614.8 696.26,597.87 687.72,597.87
  pour cut-out: 301.97,329.15 302.44,329.62 302.44,332.23 304.21,332.23 305.7,333.73 317.31,322.13 307.92,322.13 304.13,325.92
  pour cut-out: 1196.02,226.54 1197.52,226.54 1218.98,247.99 1225.54,247.99 1225.54,240.03 1230.16,235.41
  pour cut-out: 1196.02,226.54 1204.08,226.54 1225.54,247.99 1230.16,243.37 1230.16,227.44
  pour cut-out: 688.09,126.51 688.09,84.99 725.83,47.24 822.83,47.24 822.83,77.57 763.92,136.49 723.71,136.49
  pour cut-out: 426.31,491.86 440.75,477.43 443.84,477.43 445.75,479.33 445.75,499.57 425.63,499.57 425.2,500
  pour cut-out: 635.84,470.82 636.55,470.11 636.55,450.12 762.82,450.12 769.47,456.77 769.47,465.9 747.85,465.9 742.96,470.8
  pour cut-out: 636.55,510.31 635.8,509.56 635.8,489.81 743.2,489.81 743.27,489.88 742.31,490.84 742.31,504.88 719.89,504.88 714.46,510.31
Bottom Layer:
  pour cut-out: 991.15,379.75 993.06,377.84 993.06,382.65 1011.81,401.4 1011.81,374.02 994.18,374.02 991.15,377.04
  pour cut-out: 581.74,485.55 581.74,488.26 583.65,490.17 551.51,522.32 491.01,522.32 491.01,485.55

## Silkscreen, mask and mechanical layers (free items; w line width, h text height)
Top Overlay:
  text "JLinkV9-Nano / HinsShum-V1.1" at 1409.45,779.53 h60
Bottom Overlay:
  text "RST" at 1493.94,549.37 h35
  text "RST" at 1682.91,549.37 h35
  text "GND" at 1497.87,478.5 h35
  text "GND" at 1682.91,470.63 h35
  text "DIO" at 1497.87,403.7 h35
  text "TMS" at 1682.58,390.84 h35
  text "TCK" at 1682.58,312.1 h35
  text "CLK" at 1497.87,309.21 h35
  text "VCC" at 673.32,241.7 h35 r90
  text "DIO" at 748.12,241.7 h35 r90
  text "CLK" at 824.65,241.97 h35 r90
  text "GND" at 905.6,241.7 h35 r90
  text "TDO" at 1686.52,237.3 h35
  text "VCC" at 1490,214.72 h35
  text "TDI" at 1686.85,155.67 h35
  text "G" at 1348.27,147.8 h35
  text "R" at 1419.13,147.8 h35
  text "T" at 1493.94,147.8 h35
  text "G" at 1564.8,147.8 h35
  text "V" at 1671.1,72.99 h35